# Altium PCB PCB1.PcbDoc
Units mm, origin at the board's own origin, x right, y up, seen from the top; angles counter-clockwise.
Board outline 74.3 x 39.35 mm, 4 copper layers (Top Layer, GND_PLANE, PWR_PLANE, Bottom Layer), stack 0.603 mm thick; 37 components, 28 nets, 107 pads, 53 vias.
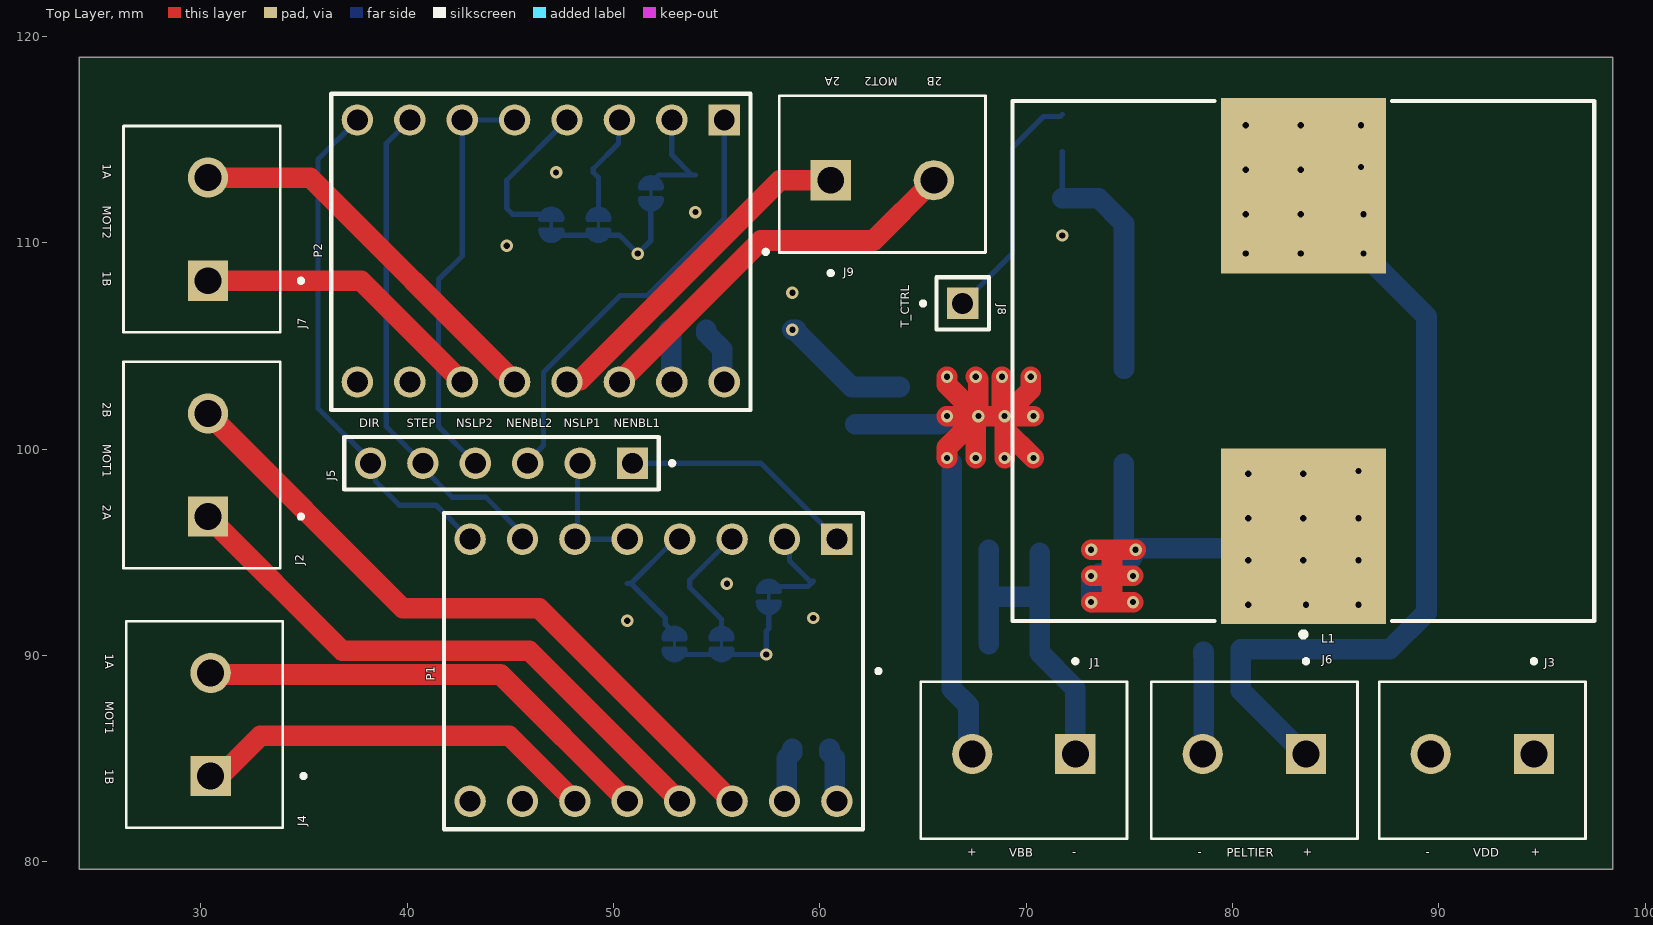
[diagram p0: Top Layer view]
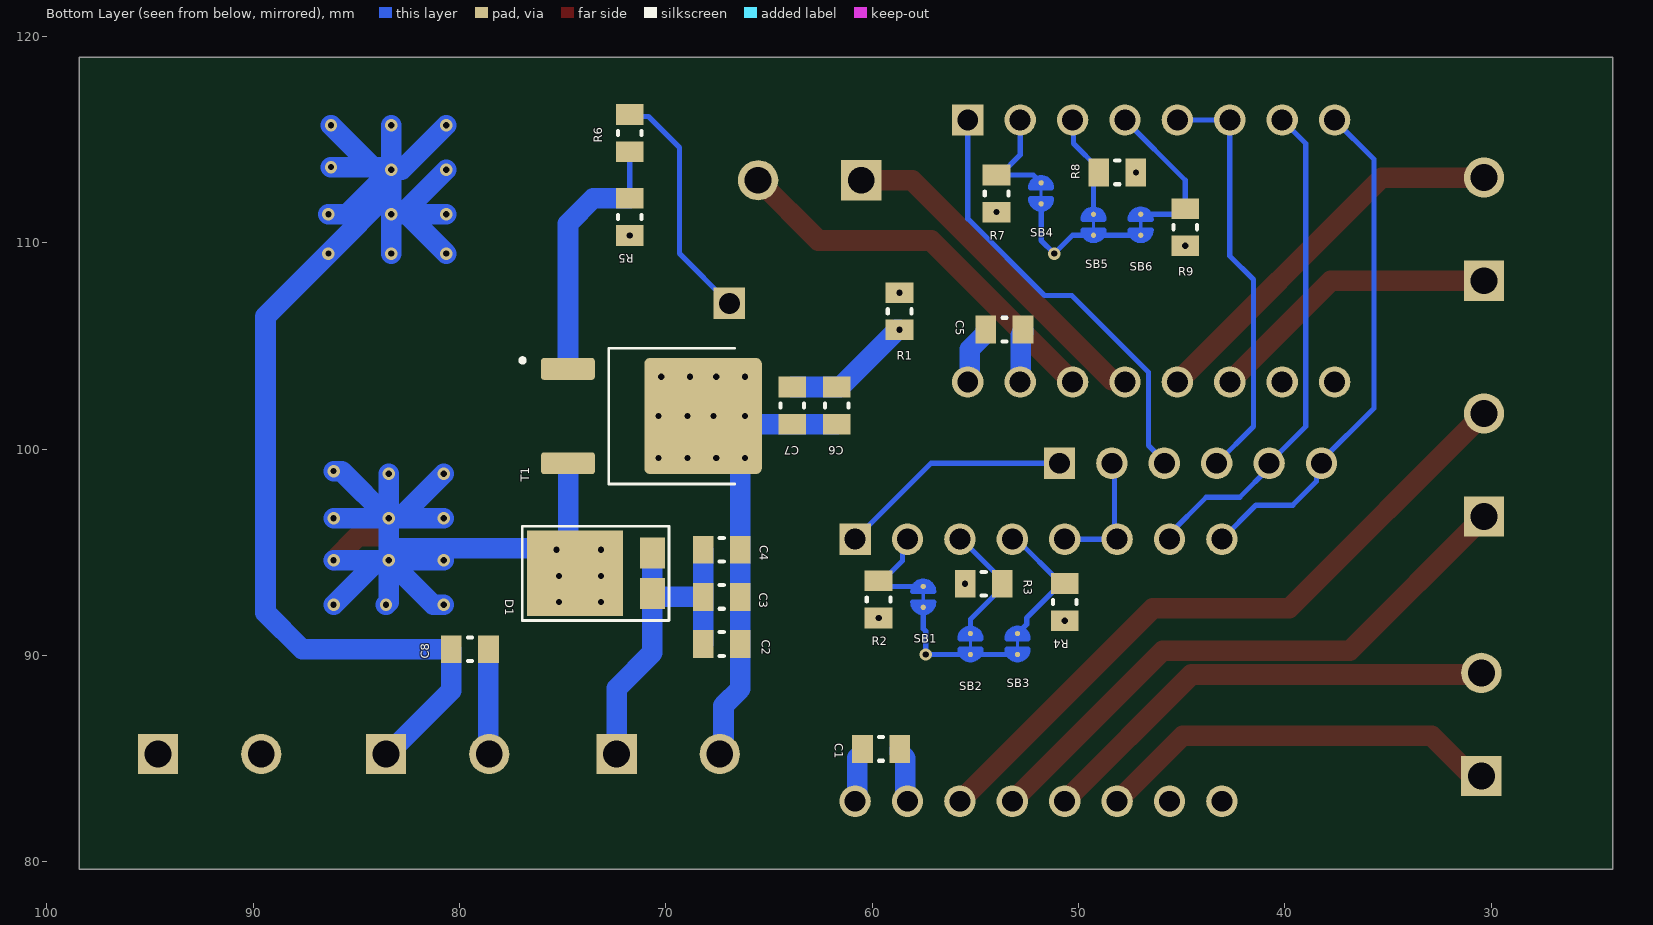
[diagram p1: Bottom Layer view, seen from below]
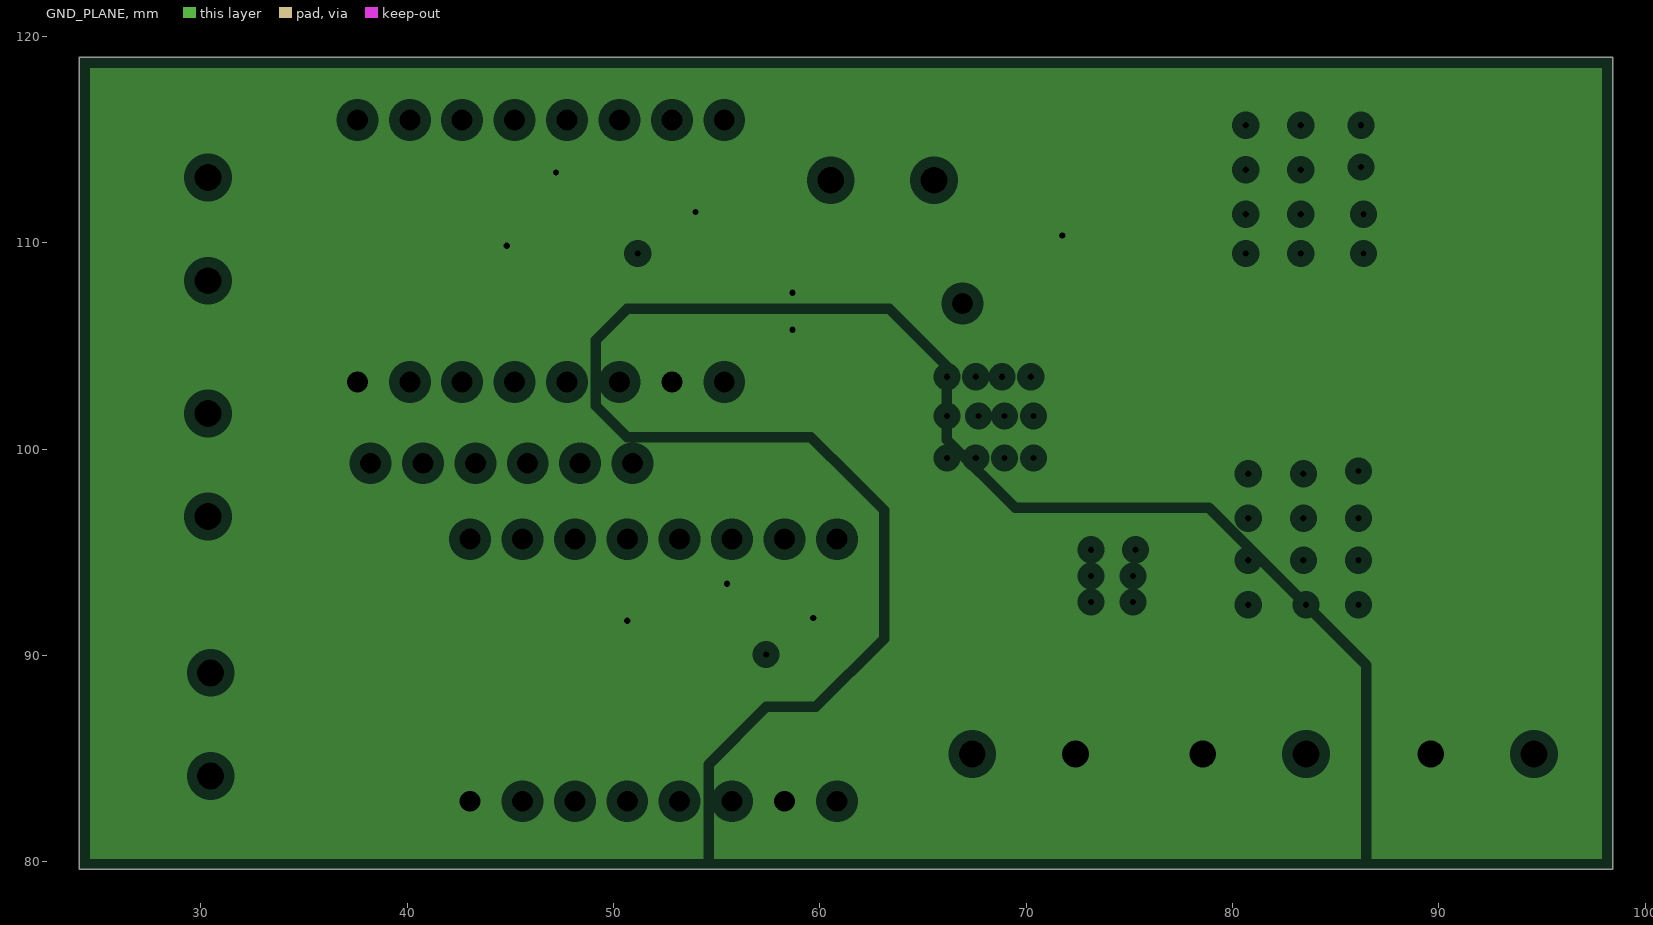
[diagram p2: GND_PLANE, clearances drawn from the general rule]
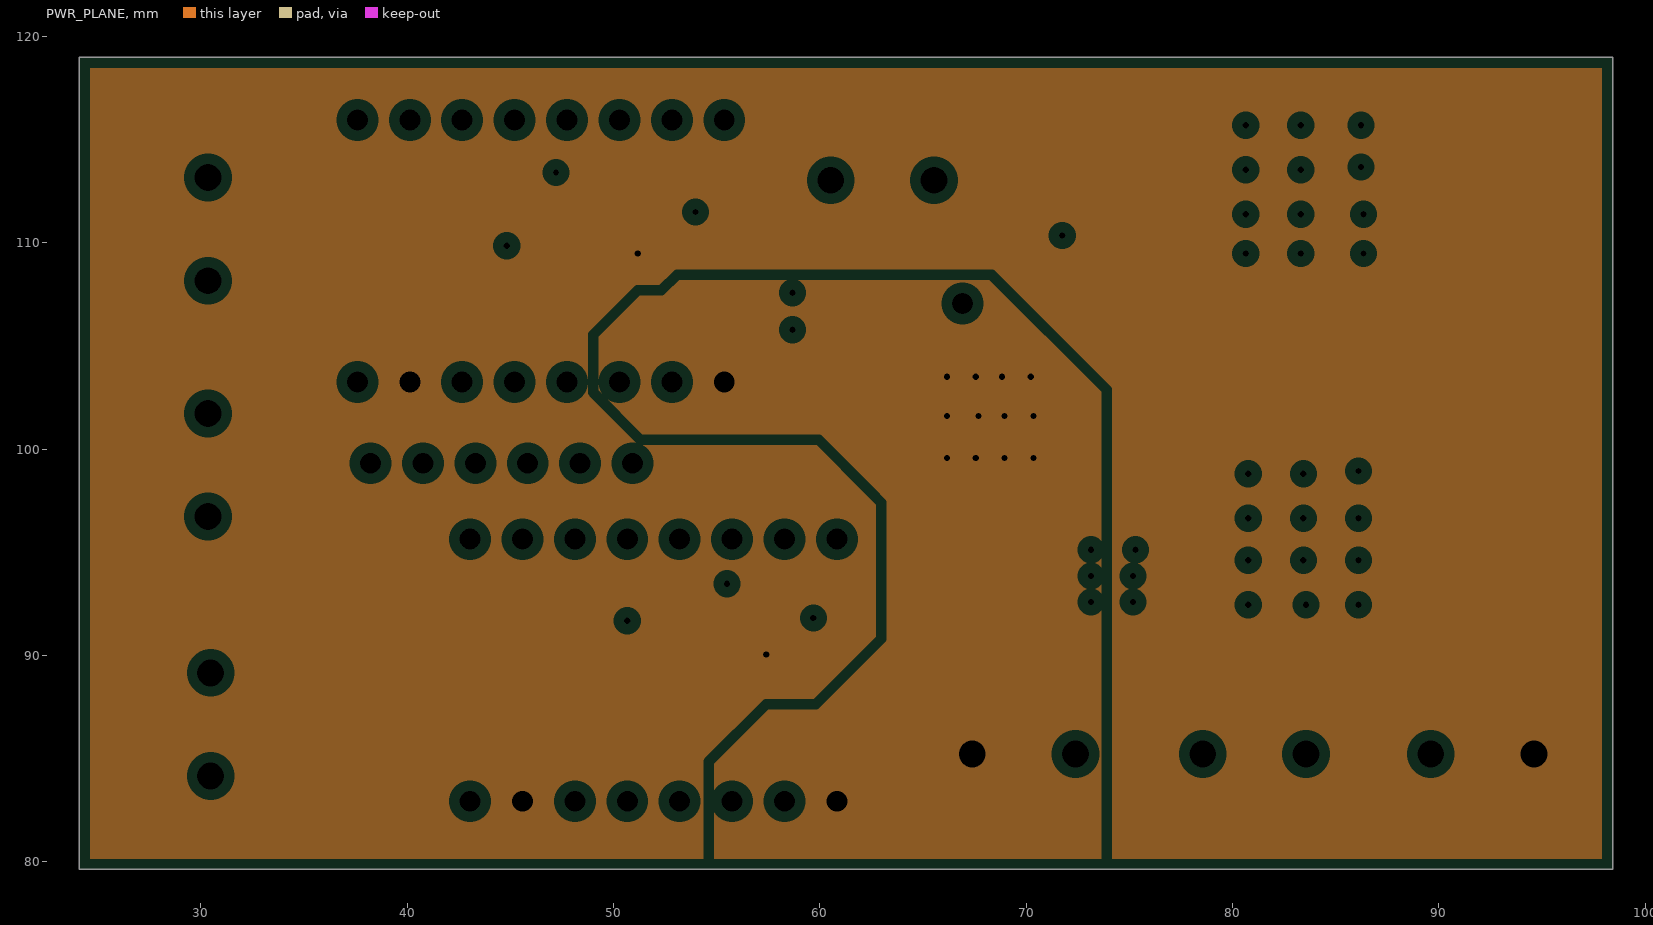
[diagram p3: PWR_PLANE, clearances drawn from the general rule]

## Layer stack, top to bottom
Top Solder: solder mask 0.0102, Solder Resist, Dk 3.5
Top Layer: signal copper 0.0356
Dielectric 2: prepreg 0.0711, PP-006, Dk 4.1
GND_PLANE: plane copper 0.035, net GND
Dielectric 1: dielectric 0.32, FR-4, Dk 4.8
PWR_PLANE: plane copper 0.035, net VDD
Dielectric 3: prepreg 0.0711, PP-006, Dk 4.1
Bottom Layer: signal copper 0.0356
Bottom Solder: solder mask 0.0102, Solder Resist, Dk 3.5

## Board outline
24.122,79.629 24.122,118.98 98.425,118.98 98.425,79.629

## Design rules (kind name [scope] priority, off if disabled: settings)
BoardOutlineClearance [All] p1: gap=0.5 ignorepadtopadclearanceinfootprint=FALSE
Clearance Clearance_bridges [All vs InComponent('SB4_MD1') OR InComponent('SB5_MD1') OR InComponent('SB6_MD1') OR InComponent('SB4_MD2') OR InComponent('SB5_MD2') OR InComponent('SB6_MD2')] p1: gap=0.05 ignorepadtopadclearanceinfootprint=FALSE
Clearance [All] p2: gap=0.15 ignorepadtopadclearanceinfootprint=FALSE
PlaneClearance [All] p1: clearance=0.508
PlaneConnect [All] p1: planeconnectstyle=Relief reliefexpansion=0.508 reliefentries=4 reliefconductorwidth=0.254 reliefairgap=0.254
PolygonConnect [All] p1: connectstyle=Relief reliefconductorwidth=0.254 reliefentries=4 polygonreliefangle="90 Angle" airgapwidth=0.254
RoutingVias [All] p1: holewidth=0.6 width=1 viastyle="Through Hole" minholewidth=0.3 minwidth=0.5 maxholewidth=0.3 maxwidth=0.6
ShortCircuit ShortCircuit_bridges [All vs InComponent('SB4_MD1') OR InComponent('SB5_MD1') OR InComponent('SB6_MD1') OR InComponent('SB4_MD2') OR InComponent('SB5_MD2') OR InComponent('SB6_MD2')] p1: allowed=TRUE
ShortCircuit [All] p2: allowed=FALSE
SolderMaskExpansion [All] p1: expansion=0.102 istentingtop=FALSE
SupplyNets "Schematic Supply Nets_3" [InNet('VBB')] p1: voltage=0.000
SupplyNets "Schematic Supply Nets_7" [InNet('VDD')] p2: voltage=0.000
SupplyNets "Schematic Supply Nets_6" [InNet('PGND')] p3: voltage=0.000
SupplyNets "Schematic Supply Nets_4" [InNet('GND')] p4: voltage=0.000
Width Width_bridges [InComponent('SB4_MD1') OR InComponent('SB5_MD1') OR InComponent('SB6_MD1') OR InComponent('SB4_MD2') OR InComponent('SB5_MD2') OR InComponent('SB6_MD2')] p1: maxlimit=0.254 minlimit=0.15 preferedwidth=0.2
Width Width_motores [InNet('VBB')] p2: maxlimit=2 minlimit=0.5 preferedwidth=1
Width [All] p3: maxlimit=1 minlimit=0.2 preferedwidth=0.25
27 further rules are at their usual default settings.

## Components (designator, comment, footprint, x,y, rotation, side; value= is the part's Value field where it differs from the comment)
C1 "100uF" RES_0805 59.574,85.471 r180 bottom
C2 "4.7uF" RES_0805 67.299,90.551 r180 bottom
C3 "100nF" RES_0805 67.299,92.837 r180 bottom
C4 "100pF" RES_0805 67.299,95.123 r180 bottom
C5 "100uF" RES_0805 53.594,105.791 r180 bottom
C6 "10uF" RES_0805 61.722,102.108 r270 bottom
C7 "100uF" RES_0805 63.881,102.108 r270 bottom
C8 "47uF" RES_0805 79.502,90.297 r0 bottom
D1 "DIODE_FSV15150V" FSV15150V_TO-277 73.406,93.98 r180 bottom
J1 "2PBORN" CUI_TB002-500-02BE 72.39,85.217 r180 top
J2 "2PBORN" CUI_TB002-500-02BE 30.353,96.727 r90 top
J3 "2PBORN" CUI_TB002-500-02BE 94.615,85.217 r180 top
J4 "2PBORN" CUI_TB002-500-02BE 30.48,84.154 r90 top
J5 "PIN_HEADER_6" GEN_PIN6 44.577,99.314 r180 top
J6 "2PBORN" CUI_TB002-500-02BE 83.566,85.217 r180 top
J7 "2PBORN" CUI_TB002-500-02BE 30.353,108.157 r90 top
J8 "PIN_HEADER_1" GEN_PIN1 66.929,107.061 r0 top
J9 "2PBORN" CUI_TB002-500-02BE 60.532,113.03 r0 top
L1 "220μH" WE-HCF_2920 83.439,104.267 r180 top
P1 "2x8_PINES" PINES8x2-sep 52.299,89.201 r180 top
P2 "2x8_PINES" PINES8x2-sep 46.838,109.521 r180 top
R1 "0" RES_0805 58.674,106.68 r270 bottom
R2 "10k" RES_0805 59.69,92.71 r90 bottom
R3 "10k" RES_0805 54.599,93.472 r180 bottom
R4 "10k" RES_0805 50.673,92.583 r90 bottom
R5 "10k" RES_0805 71.755,111.252 r90 bottom
R6 "150" RES_0805 71.755,115.316 r270 bottom
R7 "10k" RES_0805 53.975,112.384 r90 bottom
R8 "10k" RES_0805 48.122,113.411 r0 bottom
R9 "10k" RES_0805 44.831,110.755 r90 bottom
SB1 "SolderBridge_Short" SolderBridge_Short 57.531,92.837 r90 bottom
SB2 "SolderBridge_Short" SolderBridge_Short 55.245,90.551 r90 bottom
SB3 "SolderBridge_Short" SolderBridge_Short 52.959,90.551 r90 bottom
SB4 "SolderBridge_Short" SolderBridge_Short 51.816,112.395 r90 bottom
SB5 "SolderBridge_Short" SolderBridge_Short 49.276,110.871 r90 bottom
SB6 "SolderBridge_Short" SolderBridge_Short 46.99,110.871 r90 bottom
T1 "NMOS-DMT10H010LK3" MOSFET_TRANS_2DB1184Q-13 70.699,101.6 r180 bottom

## Footprints (in the part's own frame and the unit in brackets; to place one, negate y for a bottom-side part, rotate by r counter-clockwise, add the part's x,y. Pads: shape width x height; smd on the part's side, far side on the other; paste and mask are expansions set on the pad)
CUI_TB002-500-02BE [mm]
  rect 1.95x1.95 / inner round 1.95 / far side rect 1.95x1.95 hole 1.3: 1(0,0)
  round 1.95 hole 1.3: 2(5,0)
  silkscreen extent -2.5,-4.6 7.5,4.1, body extent -2.52,-4.08 7.98,3.52, height 10
FSV15150V_TO-277 [mm]
  rect 1.2x1.5 smd: 1(2.75,0.985) 2(2.75,-0.985)
  rect 4.65x4.15 smd: 3(-1,0)
  silkscreen extent -3.56,-2.29 3.56,2.29, body extent -3.25,-2.22 3.25,2.22, height 1.2
GEN_PIN1 [mil] "Generic 40 mils drill size, 100 mils step"
  rect 60x60 / inner round 60 / far side rect 60x60 hole 40: 01(0,0)
  silkscreen extent -80,-50 50,50, body extent -50,-50 50,50, height 337
GEN_PIN6 [mil] "Generic 40 mils drill size, 100 mils step"
  rect 60x60 / inner round 60 / far side rect 60x60 hole 40: 01(-250,0)
  round 60 hole 40: 02(-150,0) 03(-50,0) 04(50,0) 05(150,0) 06(250,0)
  silkscreen extent -330,-50 300,50, body extent -300,-50 300,50, height 337
MOSFET_TRANS_2DB1184Q-13 [mm]
  rrect25% 2.6x1.06 smd: 1(-4.05,2.286) 3(-4.05,-2.286)
  rrect10% 5.7x5.632 smd paste-4: 2(2.5,0)
  silkscreen extent -6.35,-3.29 4.03,3.29, body extent -4.87,-3.29 5.05,3.29, height 2.29
PINES8x2-sep [mil]
  rect 60x60 / inner round 60 / far side rect 60x60 hole 40: 1(-335.98,-253.15)
  round 60 hole 40: 2(-235.98,-253.15) 3(-135.98,-253.15) 4(-35.98,-253.15) 5(64.02,-253.15) 6(164.02,-253.15) 7(264.02,-253.15) 8(364.02,-253.15) 9(364.02,246.85) 10(264.02,246.85) 11(164.02,246.85) 12(64.02,246.85) 13(-35.98,246.85) 14(-135.98,246.85) 15(-235.98,246.85) 16(-335.98,246.85)
  silkscreen extent -419,-303 414,300, body extent -400,-301 426,300, height 571
RES_0805 [mm] "Chip Resistor, 2-Leads, Body 2.00x1.25mm, IPC Medium Density"
  rect 1x1.35 smd: 1(-0.9,0) 2(0.9,0)
  silkscreen extent -0.1,-0.58 0.1,0.58, body extent -1.05,-0.67 1.05,0.67, height 0.6
SolderBridge_Short [mil]
  round 10 smd mask+0: 1(-20,0) 2(20,0)
  Top Layer region: 10,20 21.96,18.4 29.53,10.83 29.53,-9.84 19.37,-20 10,-20
  Top Layer region: -9.02,-19.51 -20.97,-17.9 -28.54,-10.33 -28.54,10.33 -18.39,20.49 -9.02,20.49
  Top Layer lines w6: -10,0 10,0
  Top Layer lines w10: -10,-20 cw(c-10,0) -10,20 -10,-20 ; 10,-20 ccw(c10,0) 10,20 10,-20
WE-HCF_2920 [mm] "SMD High Current Inductor, body 28x25mm"
  rect 8x8.5 smd: 1(0,8.5) 2(0,-8.5)
  silkscreen extent -14.1,-12.6 14.1,13.37, body extent -13.65,-11.55 13.65,11.55, height 20

## Part data
C1 C2 C3 C4 C5 C6 C7 C8: library part CAP_0805, "Generic Capacitor"
J1 J2 J3 J4 J6 J7 J9: library part 2PBorn-TB002-500-02BE, "2~24 Poles, Screw Type, Horizontal, 5.0 Pitch, 22~12 (AWG), Terminal Block Connector", Package=None, Check_prices=https://www.snapeda.com/parts/TB002-500-02BE/Same+Sky/view-part/?ref=eda, MF="Same Sky", MP=TB002-500-02BE, SnapEDA_Link=https://www.snapeda.com/parts/TB002-500-02BE/Same+Sky/view-part/?ref=snap
J5 J8: "Generic 40 mils drill size, 100 mils step", Package=None
  J5: Check_prices=https://www.snapeda.com/parts/TS-106-T-A/Samtec+Inc./view-part/?ref=eda, MF="Samtec Inc.", MP=TS-106-T-A, SnapEDA_Link=https://www.snapeda.com/parts/TS-106-T-A/Samtec+Inc./view-part/?ref=snap
  J8: Check_prices=https://www.snapeda.com/parts/TS-101-T-AA/Samtec/view-part/?ref=eda, MF=Samtec, MP=TS-101-T-AA, SnapEDA_Link=https://www.snapeda.com/parts/TS-101-T-AA/Samtec/view-part/?ref=snap
L1: library part L220uH_74437529203221, "WE-HCF SMT High Current Inductor, size 2920, 220μH, 8.15A, 40.1mΩ", Case/Size Code=2920, DC Resistance Max=40.1mΩ, Manufacturer="Wurth Elektronik", Manufacturer Part Number=74437529203221, Max Operating Temperature=125°C, Min Operating Temperature=-40°C, Performance Rated Current=8.15A, Saturation Current @ 10%=4.1A, Saturation Current @ 30%=5.3A, Self Resonant Frequency=2.8MHz, Category="Power Inductors", ComponentLink1Description="Website Link", ComponentLink1URL=https://www.we-online.com/redexpert/article/74437529203221?ad, ComponentLink2Description="Datasheet Link", ComponentLink2URL=https://www.we-online.com/redexpert/spec/74437529203221?ad, Height=20.5mm, Inductance=220μH, Length=28mm, Match Code=WE-HCF, Mount="Surface Mount", Packaging=Tray, Width=25mm
R1 R2 R3 R4 R5 R6 R7 R8 R9: library part RES_0805, "Generic Capacitor"

## Via types
v1: diameter 0.6, hole 0.3, Top Layer to Bottom Layer, 53 vias

## Nets (pads, with @x,y where several pads share a name; then routed paths per layer and width w, separated by ;. In a path a pad name is that pad's centre, name@x,y a point inside that pad or via, vN(x,y) a via of type N, cw(c..) or ccw(c..) an arc to the next point about the centre after c; other vN are vias at no path point)
DIR: J5.06 P1.8 P2.8 | length 25.2
  Bottom Layer w0.254: P2.8 35.687,114.046 35.687,101.981 38.227,99.441 J5.06 38.464,99.077 38.464,98.442 39.624,97.282 41.402,97.282 P1.8
GND: J3.2 P1.9 P2.9 R1.1 R2.1 R3.1 R4.1 R5.1 R7.1 R8.1 R9.1
  other v1: 50.673,91.683 59.69,91.81 55.499,93.472 58.674,107.58 44.831,109.855 71.755,110.352 53.975,111.484 47.222,113.411
NENBL1: J5.01 P1.1 | length 11.4
  Bottom Layer w0.254: J5.01 57.15,99.314 P1.1
NENBL2: J5.03 P2.1 | length 21.4
  Bottom Layer w0.254: J5.03 45.847,99.406 46.609,100.168 46.609,103.724 50.33,107.446 51.651,107.446 55.372,111.167 P2.1
NetC8_2: C8.2 J6.1 L1.2 | length 68.1
  Bottom Layer w1: C8.2@80.402,90.17 80.402,88.301 J6.1@83.613,85.09 ; C8.2 87.63,90.297 89.408,92.075 89.408,106.426 v1(86.36,109.474) 83.312,112.522 ; v1(80.645,109.474) 82.55,111.379 ; v1(80.645,111.379) 82.55,111.379 ; v1(80.645,113.538) 82.804,111.379 ; v1(80.645,115.697) 82.804,113.538 v1(83.312,113.538) ; v1(83.312,109.474) v1(83.312,111.379) ; v1(83.312,115.697) v1(83.312,113.538) ; v1(86.233,113.665) 84.201,113.665 ; v1(86.233,115.697) 84.201,113.665 ; v1(86.36,111.379) 85.471,111.379 v1(83.312,113.538) ; 82.55,111.379 82.804,111.379 ; 82.804,111.379 v1(83.312,111.379) ; v1(83.312,111.379) 83.312,112.522 ; 83.312,112.522 v1(83.312,113.538) ; v1(83.312,113.538) 83.439,113.665 84.201,113.665 ; v1(83.312,113.538) 84.074,113.538 84.201,113.665
NetD1_3: D1.3 L1.1 T1.3 | length 60.2
  Top Layer w1: v1(73.152,92.583) 74.168,92.583 ; v1(73.152,93.853) 74.168,93.853 ; v1(73.152,95.123) 74.231,95.123 ; v1(75.184,92.583) 74.168,92.583 ; v1(75.184,93.853) 74.168,93.853 ; v1(75.311,95.123) 74.231,95.123 ; L1.1 84.954,95.767 v1(86.106,94.615) ; 74.168,92.583 74.168,93.853 ; 74.168,93.853 74.168,95.059 74.231,95.123
  Bottom Layer w1: v1(73.152,92.583) 73.152,93.599 73.279,93.726 v1(73.152,93.853) 73.458,93.853 73.585,93.98 D1.3 ; T1.3@74.732,99.297 74.732,95.555 74.67,95.256 74.413,94.013 D1.3 ; v1(75.311,95.123) 75.085,94.659 D1.3 ; D1.3@75.311,95.201 82.853,95.201 v1(83.439,94.615) ; v1(80.772,92.456) 81.28,92.456 v1(83.439,94.615) ; v1(80.772,94.615) v1(83.439,94.615) ; v1(80.772,96.647) 82.931,96.647 ; v1(80.772,98.806) 82.931,96.647 ; v1(83.439,98.806) v1(83.439,96.647) ; v1(83.566,92.456) 83.439,92.583 v1(83.439,94.615) ; v1(86.106,92.456) 83.947,94.615 ; v1(86.106,94.615) 83.947,94.615 ; v1(86.106,96.647) v1(83.439,96.647) ; v1(86.106,98.933) 85.725,98.933 v1(83.439,96.647) ; 82.931,96.647 v1(83.439,96.647) ; v1(83.439,94.615) 83.947,94.615 ; v1(83.439,94.615) v1(83.439,96.647)
NetJ2_1: J2.1 P1.13 | length 28.6
  Top Layer w1: J2.1 36.856,90.224 45.92,90.224 P1.13
NetJ2_2: J2.2 P1.14 | length 33.2
  Top Layer w1: J2.2 39.792,92.288 46.396,92.288 P1.14
NetJ4_1: J4.1 P1.11 | length 19.6
  Top Layer w1: J4.1@30.71,83.923 32.893,86.106 44.958,86.106 P1.11
NetJ4_2: J4.2 P1.12 | length 22.4
  Top Layer w1: J4.2@30.861,89.074 44.53,89.074 P1.12
NetJ7_1: J7.1 P2.11 | length 14.4
  Top Layer w1: J7.1 37.766,108.157 P2.11
NetJ7_2: J7.2 P2.12 | length 19
  Top Layer w1: J7.2 35.306,113.157 P2.12
NetJ8_01: J8.01 R6.1 | length 11.6
  Bottom Layer w0.254: J8.01 69.342,109.474 69.342,114.613 70.848,116.119 71.658,116.119 R6.1
NetJ9_1: J9.1 P2.13 | length 16.8
  Top Layer w1: P2.13 47.852,103.351 48.395,103.351 58.074,113.03 J9.1
NetJ9_2: J9.2 P2.14 | length 19.3
  Top Layer w1: P2.14 57.15,110.109 62.611,110.109 J9.2
NetP1_2: P1.2 R2.2 SB1.2 | length 5
  Bottom Layer w0.254: SB1.2 59.425,93.345 R2.2 59.515,93.61 58.536,94.589 58.536,95.388 P1.2
NetP1_3: P1.3 R3.2 SB2.2 | length 6.1
  Bottom Layer w0.254: SB2.2 55.245,91.751 53.699,93.297 R3.2 53.699,93.647 55.683,95.631 P1.3
NetP1_4: P1.4 R4.2 SB3.2 | length 6.7
  Bottom Layer w0.254: R4.2 R4.2@50.848,93.483 ; SB3.2 52.517,91.501 52.517,91.814 R4.2@50.848,93.483 ; P1.4 52.996,95.631 R4.2@50.848,93.483
NetP2_2: P2.2 R7.2 SB4.2 | length 5.6
  Bottom Layer w0.254: SB4.2 52.197,113.284 R7.2 53.8,113.284 52.832,114.252 P2.2
NetP2_3: P2.3 R8.2 SB5.2 | length 5.2
  Bottom Layer w0.254: SB5.2 49.276,113.157 R8.2 49.022,113.586 50.244,114.808 50.244,115.903 P2.3
NetP2_4: P2.4 R9.2 SB6.2 | length 7.8
  Bottom Layer w0.254: SB6.2 45.107,111.379 R9.2 44.831,113.03 P2.4
NetR5_2: R5.2 R6.2 T1.1 | length 12.8
  Bottom Layer w0.254: R5.2 R6.2
  Bottom Layer w1: R5.2 73.522,112.152 74.749,110.925 T1.1
NSLP1: J5.02 P1.5 P1.6 | length 6.3
  Bottom Layer w0.254: J5.02 48.26,99.187 48.26,95.758 P1.6 P1.5
NSLP2: J5.04 P2.5 P2.6 | length 20.4
  Bottom Layer w0.254: J5.04 41.529,101.092 41.529,108.223 42.672,109.366 P2.6 P2.5
PGND: C1.2 C2.1 C3.1 C4.1 C5.2 C6.1 C7.1 C8.1 D1.1 D1.2 J1.1 J6.2 P1.15 P2.15 R1.2 | length 34.4
  Bottom Layer w1: C5.2 52.694,105.616 52.797,105.513 52.797,103.286 P2.15 ; P1.15 58.393,83.031 58.393,85.015 58.674,85.296 C1.2 ; v1(58.674,105.78) 58.849,105.78 58.849,105.706 61.547,103.008 C6.1 C7.1 ; C2.1 C3.1 ; C4.1 C3.1 ; D1.1 D1.2 ; J1.1 72.39,88.402 70.656,90.136 D1.2 ; C8.1@78.602,90.17 78.602,89.995 78.613,89.984 J6.2@78.613,85.09 ; C3.1 70.556,92.837 70.656,92.937 D1.2
STEP: J5.05 P1.7 P2.7 | length 24.5
  Bottom Layer w0.254: P2.7 38.989,114.808 38.989,101.092 J5.05 40.767,99.084 42.188,97.663 43.815,97.663 45.593,95.885 P1.7
VBB: C1.1 C2.2 C3.2 C4.2 C5.1 C6.2 C7.2 J1.2 P1.16 P2.16 T1.2 | length 46.8
  Top Layer w1: v1(66.167,99.568) 66.167,100.076 v1@67.564,101.473 ; v1(66.167,101.6) v1(67.691,101.6) ; v1(66.167,103.505) 66.167,103.124 v1(67.691,101.6) ; v1(67.564,99.568) v1@67.564,101.473 ; v1(67.564,103.505) 67.691,103.378 v1(67.691,101.6) ; v1(68.834,103.505) 68.834,101.727 v1(68.961,101.6) ; v1(68.961,99.568) 68.961,100.965 ; v1(70.231,103.505) 70.231,102.87 v1(68.961,101.6) ; v1(70.358,99.568) 68.961,100.965 ; v1(70.358,101.6) v1(68.961,101.6) ; v1@67.564,101.473 v1(67.691,101.6) ; v1(67.691,101.6) v1(68.961,101.6) ; 68.961,100.965 v1(68.961,101.6)
  Bottom Layer w1: C5.1 54.494,105.616 55.272,104.838 55.272,103.351 P2.16 ; C1.1 60.474,85.296 60.733,85.037 60.733,83.031 P1.16 ; C6.2 C7.2 65.849,101.208 66.167,101.526 v1(66.167,101.6) ; v1(66.167,99.568) 66.399,99.336 C4.2 C3.2 C2.2 66.399,88.376 67.208,87.567 67.208,85.399 J1.2
VDD: J3.1 P1.10 P2.10 SB1.1 SB2.1 SB3.1 SB4.1 SB5.1 SB6.1 | length 14
  Bottom Layer w0.254: SB6.1 SB5.1 50.292,110.363 v1(51.181,109.474) 51.816,110.109 SB4.1 ; SB3.1 SB2.1 v1(57.404,90.043) 57.404,91.169 57.531,91.296 SB1.1

## Polygon pours and split planes (outlines as drawn)
GND on GND_PLANE (split plane): 97.915,80.139 86.743,80.139 86.743,89.535 86.734,89.601 86.709,89.663 86.668,89.716 79.048,97.336 78.995,97.377 78.933,97.402 78.867,97.411 69.575,97.411 66.423,100.563 66.423,104.013 66.414,104.079 66.389,104.141 66.348,104.194 63.554,106.988 63.501,107.029 63.439,107.054 63.373,107.063 50.673,107.063 50.607,107.054 50.545,107.029 50.492,106.988 48.968,105.464 48.927,105.411 48.902,105.349 48.893,105.283 48.893,102.108 48.902,102.042 48.927,101.98 48.968,101.927 50.492,100.403 50.545,100.362 50.607,100.337 50.673,100.328 59.457,100.328 61.414,98.371 62.863,96.922 62.863,90.911 59.711,87.759 57.404,87.759 57.338,87.75 57.276,87.725 57.223,87.684 54.429,84.89 54.388,84.837 54.363,84.775 54.354,84.709 54.354,80.139 24.632,80.139 24.632,118.47 97.915,118.47
PGND on GND_PLANE (split plane): 65.911,103.907 65.911,100.457 65.92,100.391 65.945,100.329 65.986,100.276 69.288,96.974 69.341,96.933 69.359,96.926 69.403,96.908 69.469,96.899 78.761,96.899 86.231,89.429 86.231,80.139 54.866,80.139 54.866,84.603 57.51,87.247 59.817,87.247 59.883,87.256 59.945,87.281 59.998,87.322 63.3,90.624 63.341,90.677 63.348,90.695 63.366,90.739 63.375,90.805 63.375,97.028 63.366,97.094 63.341,97.156 63.3,97.209 61.776,98.733 59.744,100.765 59.691,100.806 59.629,100.831 59.563,100.84 50.779,100.84 49.405,102.214 49.405,105.177 50.779,106.551 63.267,106.551
VDD on PWR_PLANE (split plane): 97.915,80.139 74.17,80.139 74.17,102.87 74.161,102.936 74.143,102.98 74.136,102.998 74.095,103.051 68.507,108.639 68.454,108.68 68.392,108.705 68.326,108.714 53.086,108.714 53.02,108.705 52.958,108.68 52.905,108.639 52.218,107.952 51.181,107.952 51.115,107.943 51.071,107.925 51.053,107.918 51,107.877 48.841,105.718 48.8,105.665 48.775,105.603 48.766,105.537 48.766,102.743 48.775,102.677 48.8,102.615 48.841,102.562 51.127,100.276 51.18,100.235 51.242,100.21 51.308,100.201 59.838,100.201 62.303,97.736 62.736,97.303 62.736,90.911 59.711,87.886 57.404,87.886 57.338,87.877 57.276,87.852 57.223,87.811 54.429,85.017 54.388,84.964 54.363,84.902 54.354,84.836 54.354,80.139 24.632,80.139 24.632,118.47 97.915,118.47
VBB on PWR_PLANE (split plane): 73.658,102.764 73.658,80.139 54.866,80.139 54.866,84.73 57.51,87.374 59.817,87.374 59.883,87.383 59.945,87.408 59.998,87.449 63.173,90.624 63.214,90.677 63.239,90.739 63.248,90.805 63.248,97.409 63.239,97.475 63.214,97.537 63.173,97.59 62.665,98.098 60.125,100.638 60.072,100.679 60.01,100.704 59.944,100.713 51.414,100.713 49.278,102.849 49.278,105.431 51.287,107.44 52.324,107.44 52.39,107.449 52.452,107.474 52.505,107.515 53.192,108.202 68.22,108.202

## Other copper
GND_PLANE (plane layer: these items are gaps in the copper):
  lines w0.508: 54.61,79.629 54.61,84.709 57.404,87.503 59.817,87.503 63.119,90.805 63.119,97.028 61.595,98.552 59.563,100.584 50.673,100.584 49.149,102.108 49.149,105.283 50.673,106.807 62.865,106.807 63.373,106.807 66.167,104.013 66.167,100.457 69.469,97.155 78.867,97.155 86.487,89.535 86.487,79.629
  lines w1: 54.61,79.629 86.487,79.629
PWR_PLANE (plane layer: these items are gaps in the copper):
  lines w0.508: 50.546,99.314 51.435,99.314 ; 54.61,79.629 54.61,84.836 57.404,87.63 59.817,87.63 62.992,90.805 62.992,97.409 62.484,97.917 59.944,100.457 51.308,100.457 49.022,102.743 49.022,105.537 51.181,107.696 52.324,107.696 53.086,108.458 68.326,108.458 73.914,102.87 73.914,79.756
  lines w1: 54.61,79.629 73.787,79.629

## Silkscreen, mask and mechanical layers (free items; w line width, h text height)
Top Overlay:
  text "2A" at 60.987,118.01 h0.4 r180
  text "MOT2" at 63.781,118.01 h0.4 r180
  text "2B" at 65.94,118.01 h0.4 r180
  text "1A" at 25.246,113.819 h0.4 r270
  text "MOT2" at 25.246,111.787 h0.4 r270
  text "1B" at 25.246,108.612 h0.4 r270
  text "T_CTRL" at 64.349,105.891 h0.4 r90
  text "2B" at 25.246,102.262 h0.4 r270
  text "DIR" at 37.692,101.065 h0.4
  text "STEP" at 39.978,101.065 h0.4
  text "NSLP2" at 42.391,101.065 h0.4
  text "NENBL2" at 44.804,101.065 h0.4
  text "NSLP1" at 47.598,101.065 h0.4
  text "NENBL1" at 50.011,101.065 h0.4
  text "MOT1" at 25.246,100.23 h0.4 r270
  text "2A" at 25.246,97.309 h0.4 r270
  text "1A" at 25.373,90.07 h0.4 r270
  text "MOT1" at 25.373,87.784 h0.4 r270
  text "1B" at 25.373,84.482 h0.4 r270
  text "+" at 67.156,80.297 h0.4
  text "-" at 72.236,80.291 h0.4
  text "-" at 78.332,80.291 h0.4
  text "+" at 83.412,80.297 h0.4
  text "-" at 89.381,80.291 h0.4
  text "+" at 94.461,80.297 h0.4
  text "VBB" at 69.188,80.237 h0.4
  text "PELTIER" at 79.729,80.237 h0.4
  text "VDD" at 91.667,80.237 h0.4
Mechanical 1:
  the board outline again, w0.1